# Altium PCB VNA_CHANNEL4.PcbDoc (part 3 of 3)
Units mm, origin at the board's own origin, x right, y up, seen from the top; angles counter-clockwise.
Board outline 32.68 x 75 mm, 4 copper layers (Top Layer, GND, PWR, Bottom Layer), stack 0.758 mm thick; 212 components, 188 nets, 838 pads, 877 vias.
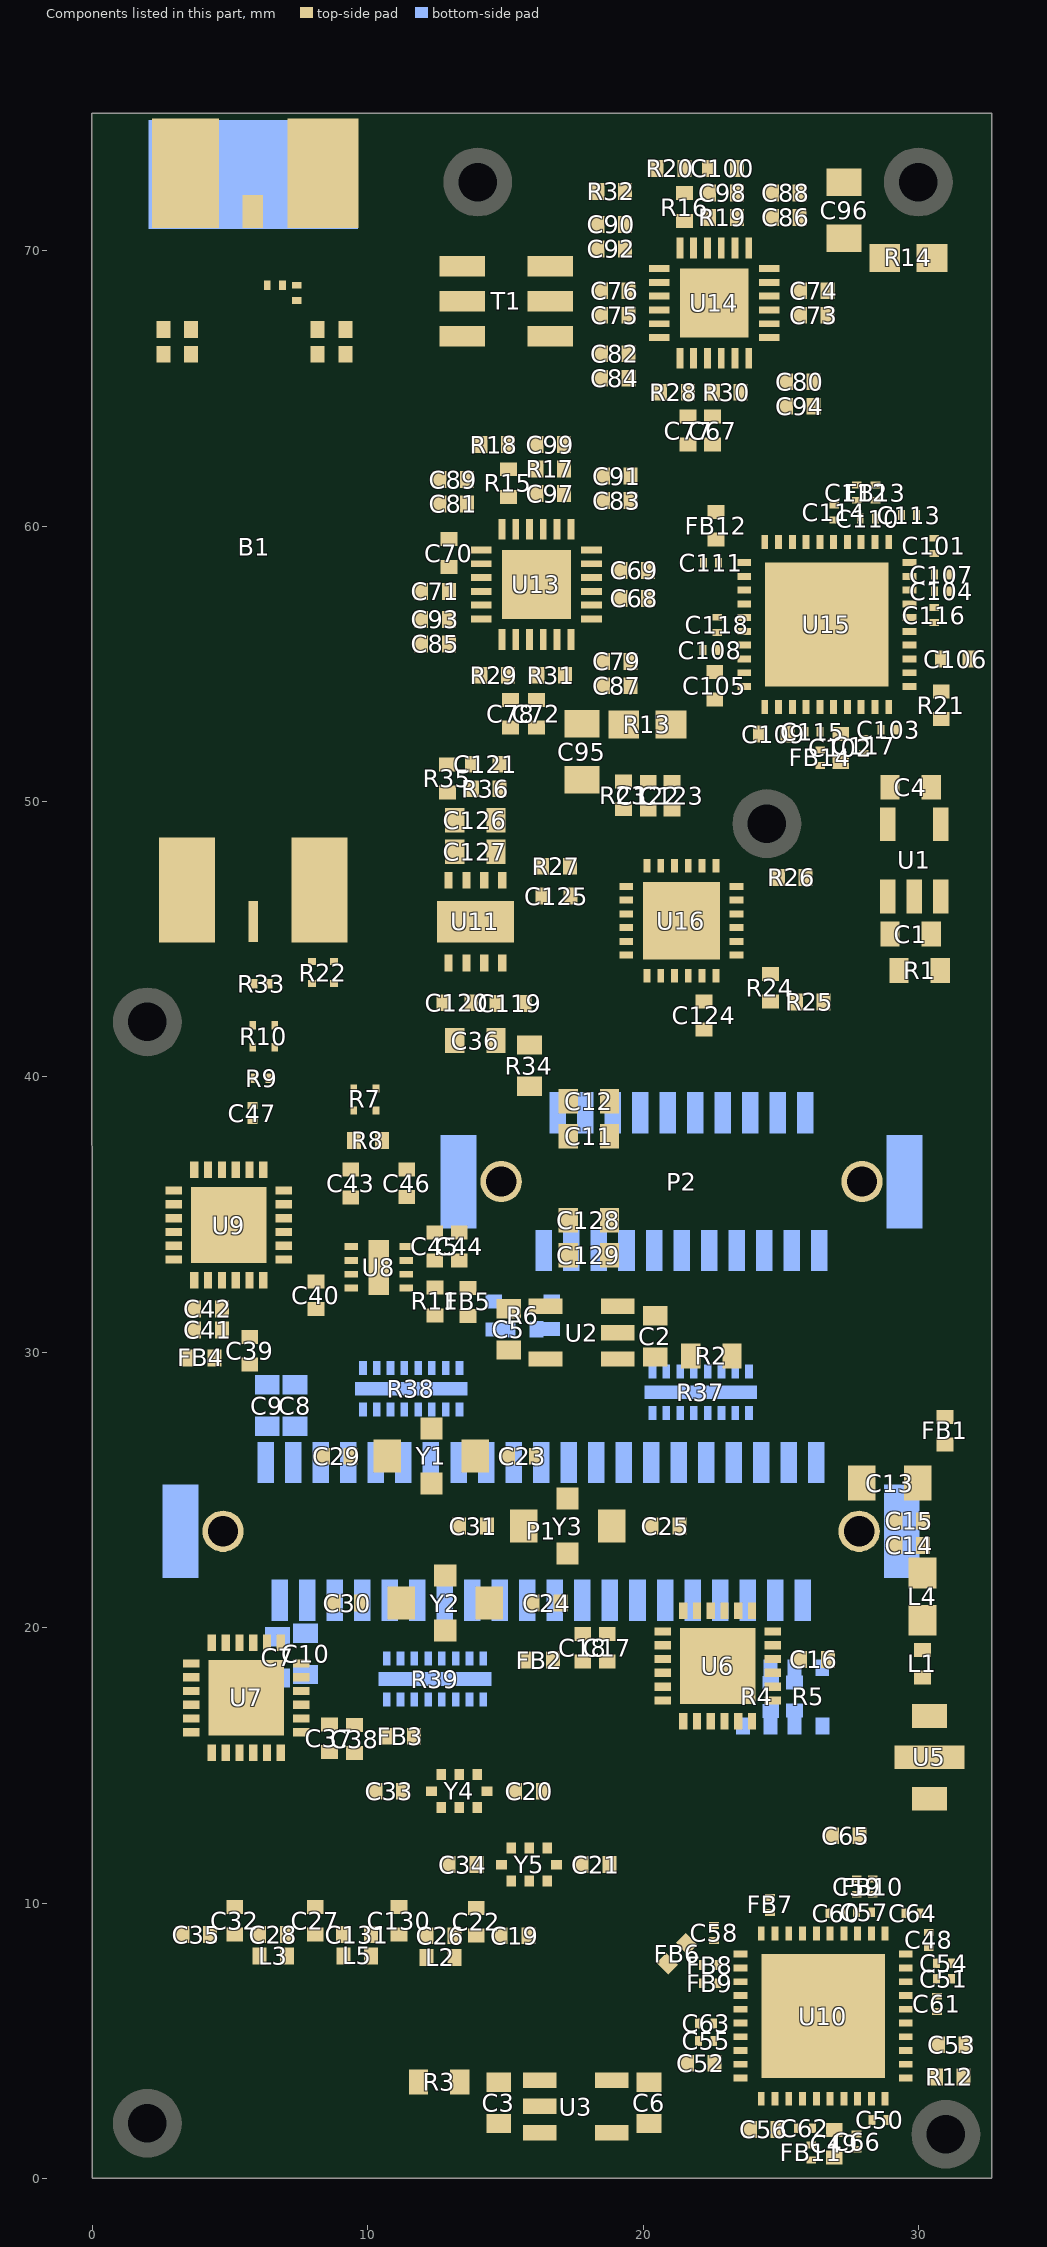
[diagram p5: the components of this part, seen from the top]

## Polygon pours and split planes (outlines as drawn) (continued)
GND on PWR (split plane): 5.091,14.91 5.097,14.867 5.113,14.827 5.14,14.792 5.174,14.766 5.215,14.749 5.258,14.743 26.619,14.743 26.662,14.749 26.702,14.766 26.737,14.792 26.763,14.827 26.78,14.867 26.786,14.91 26.786,26.021 32.149,26.021 32.149,10.809 19.659,10.809 19.616,10.803 19.576,10.787 19.542,10.76 19.515,10.726 19.499,10.686 19.493,10.643 19.493,0.51 0.51,0.51 0.501,28.84 5.091,28.84
3.6V on PWR (split plane): 26.452,15.076 5.424,15.076 5.424,28.84 14.692,28.84 14.692,18.517 14.698,18.474 14.715,18.433 14.741,18.399 14.776,18.372 14.816,18.356 14.859,18.35 18.491,18.35 18.534,18.356 18.574,18.372 18.609,18.399 18.635,18.433 18.652,18.474 18.658,18.517 18.658,31.075 26.452,31.075
GND on GND (split plane): 32.149,0.51 0.51,0.51 0.486,74.489 5.355,74.489 5.355,70.775 6.355,70.775 6.355,74.489 32.149,74.489

## Keep-outs
Keep-Out Layer:
  lines w0.254: -0.025,74.999 0,0 32.659,0 32.659,74.999 -0.009,74.999

## Other copper
Bottom Layer:
  pour cut-out: 3.4,68.2 8.4,68.2 8.4,65.446 3.4,65.446
GND (plane layer: these items are gaps in the copper):
  region: 19.467,22.855 19.467,24.608 18.248,24.608 18.248,22.855
  region: 16.267,22.855 16.267,24.608 15.048,24.608 15.048,22.855
  region: 15.022,20.061 15.022,21.814 13.803,21.814 13.803,20.061
  region: 11.822,20.061 11.822,21.814 10.603,21.814 10.603,20.061
  region: 14.514,25.395 14.514,27.148 13.295,27.148 13.295,25.395
  region: 11.314,25.395 11.314,27.148 10.095,27.148 10.095,25.395
  rectangle: 15.798,66.294 17.551,67.513
  rectangle: 15.798,68.834 17.551,70.053
  rectangle: 12.598,68.834 14.351,70.053
PWR (plane layer: these items are gaps in the copper):
  lines w0.33: -0.012,35.382 18.491,35.382 18.491,18.517 15.799,18.517 ; -0.01,29.007 14.859,29.007 14.859,18.517 16.027,18.517 ; 5.283,29.007 5.258,29.007 5.258,14.91 26.238,14.91 26.619,14.91 26.619,31.242 ; 9.085,48.858 9.144,48.858 ; 11.811,51.587 18.923,51.587 18.923,63.627 18.466,63.627 ; 11.811,63.627 18.466,63.627 ; 11.811,75.032 11.811,40.234 26.619,40.234 26.619,31.242 ; 18.466,74.999 18.466,63.627 ; 18.491,31.242 26.619,31.242 ; 19.659,0.101 19.659,10.643 32.628,10.643 ; 26.619,26.187 32.636,26.187 32.636,26.213 ; 27.432,74.999 27.432,63.627 27.381,63.627 18.694,63.627 18.466,63.627 ; 32.512,47.727 27.559,47.727 22.225,53.061 22.225,61.316 31.891,61.316 32.779,61.316

## Silkscreen, mask and mechanical layers (free items; w line width, h text height)
Top Solder:
  rectangle: 6.655,67.564 7.264,68.478
  rectangle: 2.21,68.224 9.652,74.727
Bottom Solder:
  rectangle: 1.778,45.001 9.666,48.717
  rectangle: -0.009,62.4 11.8,74.999
  rectangle: 24.7,3.8 27.7,7.2
  rectangle: 27.5,10.9 31.3,20.8
  rectangle: 12.7,43.9 17.6,47.6
  rectangle: 19,43.1 23,47.2
  rectangle: 20.2,65.9 26.1,70.7
  rectangle: 13.6,55 19.8,60.8
  rectangle: 23.8,54 28.5,59.1